# Altium PCB DRV5032DULPGM.PcbDoc
Units mil, origin at the board's own origin, x right, y up, seen from the top; angles counter-clockwise.
Board outline 700 x 500 mil, 2 copper layers (Top Layer, Bottom Layer); 4 components, 207 nets, 12 pads, 0 vias.
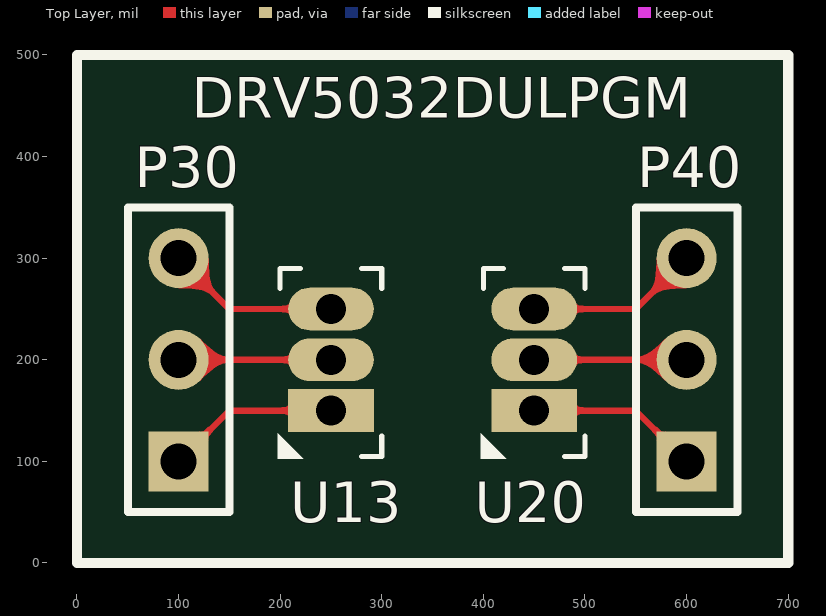
[diagram p0: Top Layer view]
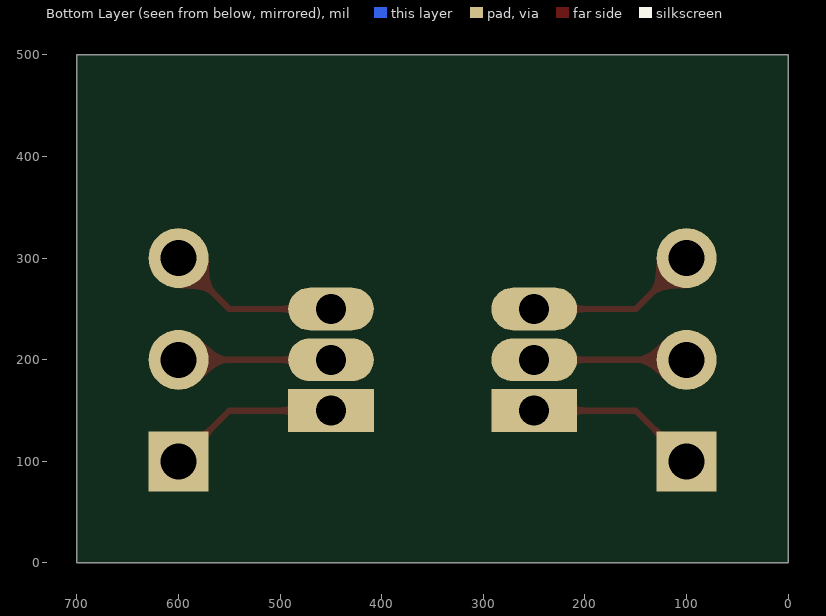
[diagram p1: Bottom Layer view, seen from below]

## Layer stack, top to bottom
Top Solder: solder mask 0.4, Solder Resist, Dk 3.5
Top Layer: signal copper 1.4
Dielectric 1: dielectric 12.6, FR-4, Dk 4.8
Bottom Layer: signal copper 1.4
Bottom Solder: solder mask 0.4, Solder Resist, Dk 3.5

## Board outline
0,0 700,0 700,500 0,500

## Design rules (kind name [scope] priority, off if disabled: settings)
Clearance [All] p1: gap=6.3 ignorepadtopadclearanceinfootprint=TRUE
PolygonConnect [All] p1: connectstyle=Relief reliefconductorwidth=10 reliefentries=4 polygonreliefangle="90 Angle" airgapwidth=10
RoutingVias [All] p1: holewidth=28 width=50 viastyle="Through Hole" minholewidth=28 minwidth=50 maxholewidth=28 maxwidth=50
SolderMaskExpansion [All] p1: expansion=4 istentingtop=FALSE
Width [All] p1: maxlimit=6.3 minlimit=6.3 preferedwidth=6.3
30 further rules are at their usual default settings.

## Classes and differential pairs
component class STM32L010C6T6: B4
component class RTC: U7
component class Polarity_Protection: Q1 Q2
component class NV_Memory: B3
component class Motor_Driver: B2 U5 U6
component class Door_Sensor: S1 S2 U3
component class Current_Sensor: B1 U2
component class Battery_Gauge: U1

## Components (designator, comment, footprint, x,y, rotation, side; value= is the part's Value field where it differs from the comment)
P30 "Header 3" HDR1X3 100,100 r90 top
P40 "Header 3" HDR1X3 600,100 r90 top
U13 "DRV5032AJLPGM" SENSOR_DRV5055A2QLPGM 250,200 r90 top
U20 "DRV5032AJLPGM" SENSOR_DRV5055A2QLPGM 450,200 r90 top

## Footprints (in the part's own frame and the unit in brackets; to place one, negate y for a bottom-side part, rotate by r counter-clockwise, add the part's x,y. Pads: shape width x height; smd on the part's side, far side on the other; paste and mask are expansions set on the pad)
HDR1X3 [mm] "Connector; Header; 3 Position"
  rect 1.5x1.5 hole 0.9: 1(0,0)
  round 1.5 hole 0.9: 2(2.54,0) 3(5.08,0)
  silkscreen extent -1.27,-1.27 6.35,1.27
SENSOR_DRV5055A2QLPGM [mm]
  rect 1.07x2.14 hole 0.75: 1(-1.27,0)
  oval 1.07x2.14 hole 0.75: 2(0,0) 3(1.27,0)
  silkscreen extent -2.48,-1.27 2.29,1.33, body extent -2,-0.89 2,0.64, height 5.1

## Part data
P30 P40: "Header, 3-Pin", LatestRevisionDate=17-Jul-2002, LatestRevisionNote="Re-released for DXP Platform.", Publisher="Altium Limited"
U13 U20: "Low power (5 Hz, <1ÂµA), low voltage (up to 5.5V) switch", Package="TO-92-3 Texas Instruments", Availability="In Stock", Check_prices=https://www.snapeda.com/parts/DRV5032AJLPGM/Texas+Instruments/view-part/?ref=eda, MF="Texas Instruments", MP=DRV5032AJLPGM, Price=None, Purchase-URL=https://pricing.snapeda.com/search/part/DRV5032AJLPGM/?ref=eda, SnapEDA_Link=https://www.snapeda.com/parts/DRV5032AJLPGM/Texas+Instruments/view-part/?ref=snap

## Nets (pads, with @x,y where several pads share a name; then routed paths per layer and width w, separated by ;. In a path a pad name is that pad's centre, name@x,y a point inside that pad or via, vN(x,y) a via of type N, cw(c..) or ccw(c..) an arc to the next point about the centre after c; other vN are vias at no path point)
GND: 
NetB1_1: 
NetB1_2: 
NetB1_3: 
NetB1_4: 
NetB1_5: 
NetB1_6: 
NetB1_7: 
NetB1_8: 
NetB1_9: 
NetB1_10: 
NetB2_1: 
NetB2_2: 
NetB2_3: 
NetB2_4: 
NetB2_5: 
NetB2_6: 
NetB2_7: 
NetB2_8: 
NetB2_9: 
NetB3_1: 
NetB3_2: 
NetB3_3: 
NetB3_4: 
NetB3_5: 
NetB3_6: 
NetB3_7: 
NetB3_8: 
NetB3_9: 
NetB4_1: 
NetB4_2: 
NetB4_3: 
NetB4_4: 
NetB4_5: 
NetB4_6: 
NetB4_7: 
NetB4_8: 
NetB4_9: 
NetB4_10: 
NetB4_11: 
NetB4_12: 
NetB4_13: 
NetB4_14: 
NetB4_15: 
NetB4_16: 
NetB4_17: 
NetB4_18: 
NetB4_19: 
NetB4_20: 
NetB4_21: 
NetB4_22: 
NetB4_23: 
NetB4_24: 
NetB4_25: 
NetB4_26: 
NetB4_27: 
NetB4_28: 
NetB4_29: 
NetB4_30: 
NetB4_31: 
NetB4_32: 
NetB4_33: 
NetB4_34: 
NetB4_35: 
NetB4_36: 
NetB4_37: 
NetB4_38: 
NetB4_39: 
NetB4_40: 
NetB4_41: 
NetB4_42: 
NetB4_43: 
NetB4_44: 
NetB4_45: 
NetB4_46: 
NetB4_47: 
NetB4_48: 
NetP1_1: 
NetP1_2: 
NetP1_3: 
NetP1_4: 
NetP1_5: 
NetP1_6: 
NetP1_7: 
NetP1_8: 
NetP2_1: 
NetP2_2: 
NetP2_3: 
NetP2_4: 
NetP2_5: 
NetP2_6: 
NetP2_7: 
NetP5_1: 
NetP5_2: 
NetP5_3: 
NetP6_1: 
NetP6_2: 
NetP6_3: 
NetP7_1: 
NetP7_2: 
NetP7_3: 
NetP11_1: 
NetP11_2: 
NetP11_3: 
NetP14_1: 
NetP14_2: 
NetP14_3: 
NetP14_4: 
NetP14_5: 
NetP16_1: 
NetP16_2: 
NetP16_3: 
NetP17_1: 
NetP17_2: 
NetP17_3: 
NetP19_1: 
NetP19_2: 
NetP19_3: 
NetP19_4: 
NetP20_1: 
NetP20_2: 
NetP20_3: 
NetP21_1: 
NetP21_2: 
NetP21_3: 
NetP22_1: 
NetP22_2: 
NetP22_3: 
NetP22_4: 
NetP23_1: 
NetP23_2: 
NetP23_3: 
NetP23_4: 
NetP25_1: 
NetP25_2: 
NetP25_3: 
NetP26_1: 
NetP26_3: 
NetP27_1: 
NetP27_2: 
NetP27_3: 
NetP28_1: 
NetP28_2: 
NetP28_3: 
NetP29_1: 
NetP29_2: 
NetP29_3: 
NetP30_1: P30.1 U13.1 | length 170.7
  Top Layer w6.3: P30.1 150,150 U13.1
NetP30_2: P30.2 U13.2 | length 150
  Top Layer w6.3: P30.2 U13.2
NetP30_3: P30.3 U13.3 | length 170.7
  Top Layer w6.3: P30.3 150,250 U13.3
NetP31_1: 
NetP31_2: 
NetP32_1: 
NetP32_2: 
NetP33_1: 
NetP33_2: 
NetP34_1: 
NetP34_2: 
NetP35_1: 
NetP35_2: 
NetP36_1: 
NetP36_2: 
NetP36_3: 
NetP37_1: 
NetP37_2: 
NetP37_3: 
NetP38_1: 
NetP38_2: 
NetP38_3: 
NetP39_1: 
NetP39_2: 
NetP39_3: 
NetP40_1: P40.1 U20.1 | length 170.7
  Top Layer w6.3: U20.1 550,150 P40.1
NetP40_2: P40.2 U20.2 | length 150
  Top Layer w6.3: U20.2 P40.2
NetP40_3: P40.3 U20.3 | length 170.7
  Top Layer w6.3: U20.3 550,250 P40.3
NRST: 
PA0-CK_IN: 
PA1: 
PA2: 
PA3: 
PA4: 
PA5: 
PA6: 
PA7: 
PA8: 
PA9: 
PA10: 
PA11: 
PA12: 
PA13: 
PA14: 
PA15: 
PB0: 
PB1: 
PB3: 
PB4: 
PB5: 
PB6: 
PB7: 
PB9-BOOT0: 
PC14-OSC32_IN: 
PC15-OSC32_OUT: 
VDD1: 
VDD2: 
VDDA: 
VSS1: 
VSS2: 

## Silkscreen, mask and mechanical layers (free items; w line width, h text height)
Top Overlay:
  the board outline again, w10
  text "DRV5032DULPGM" at 113,438 h40